# Altium PCB CAN_Test_Runner.PcbDoc (part 1 of 2)
Units mil, origin at the board's own origin, x right, y up, seen from the top; angles counter-clockwise.
Board outline 3937.01 x 2598.43 mil, 4 copper layers (Top Layer, Mid-Layer 1, Mid-Layer 2, Bottom Layer); 131 components, 89 nets, 516 pads, 356 vias.
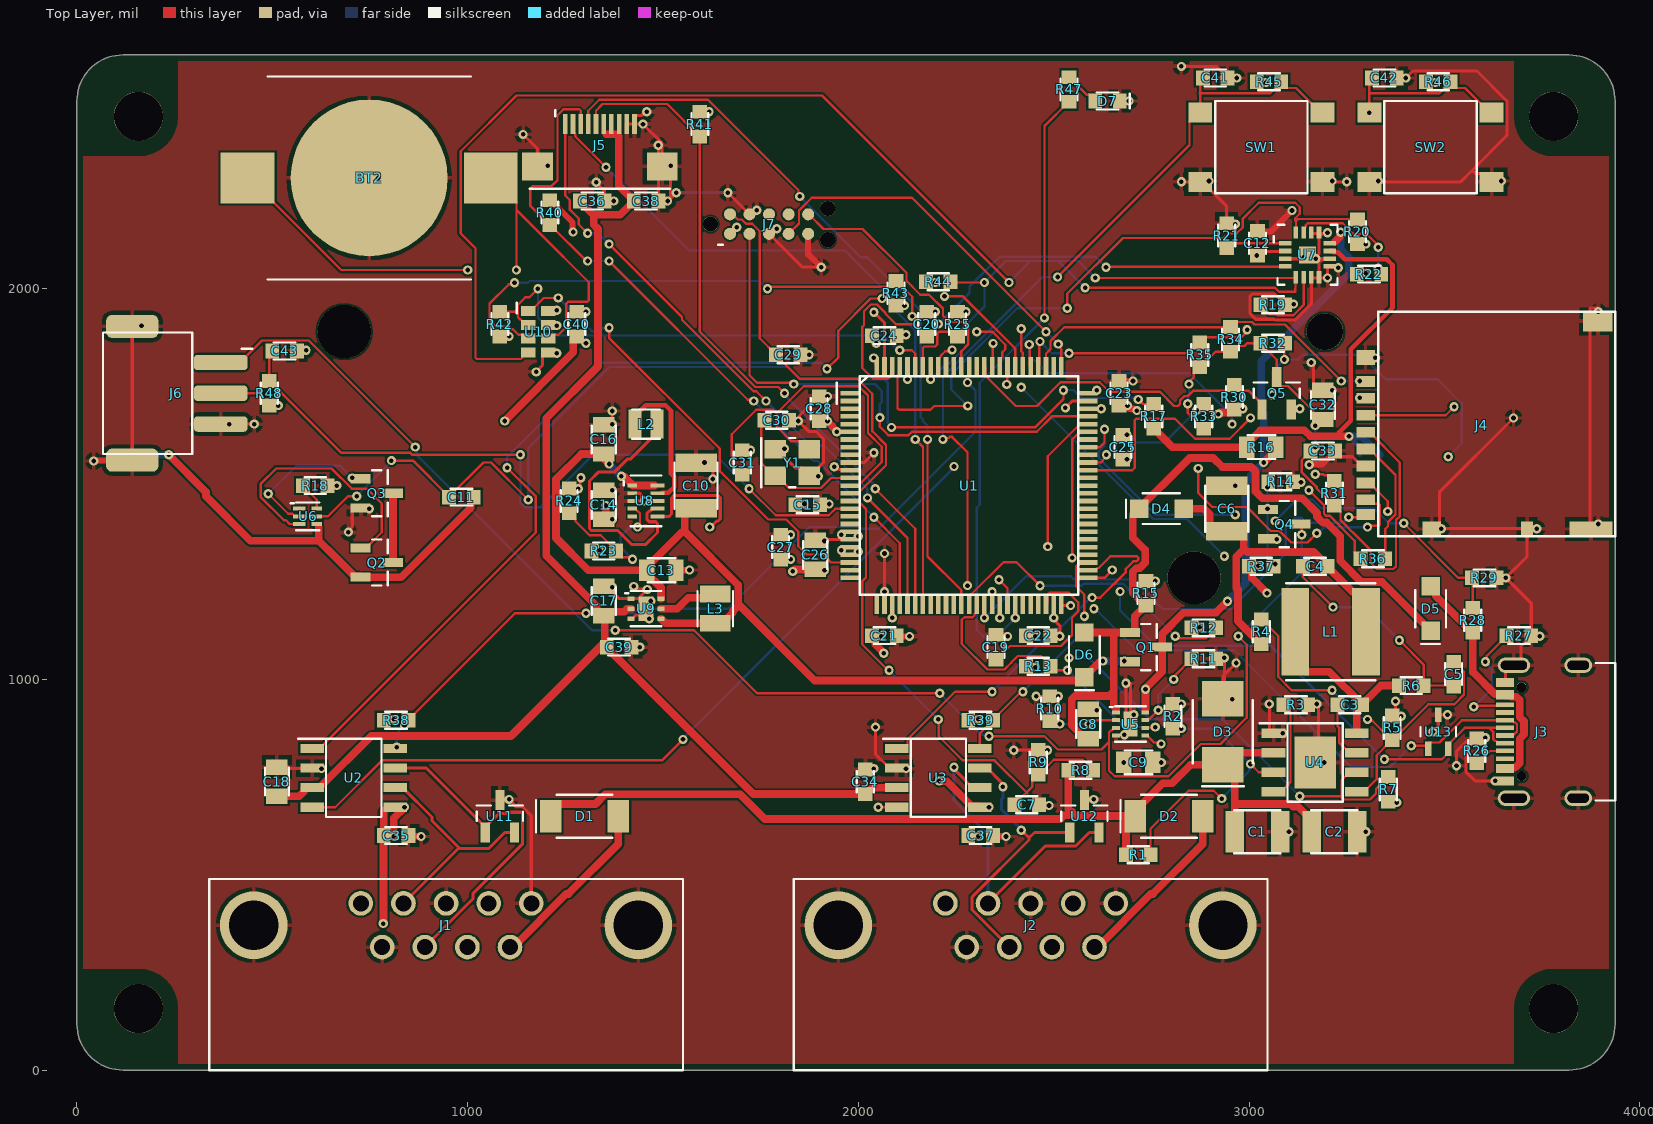
[diagram p0: Top Layer view]
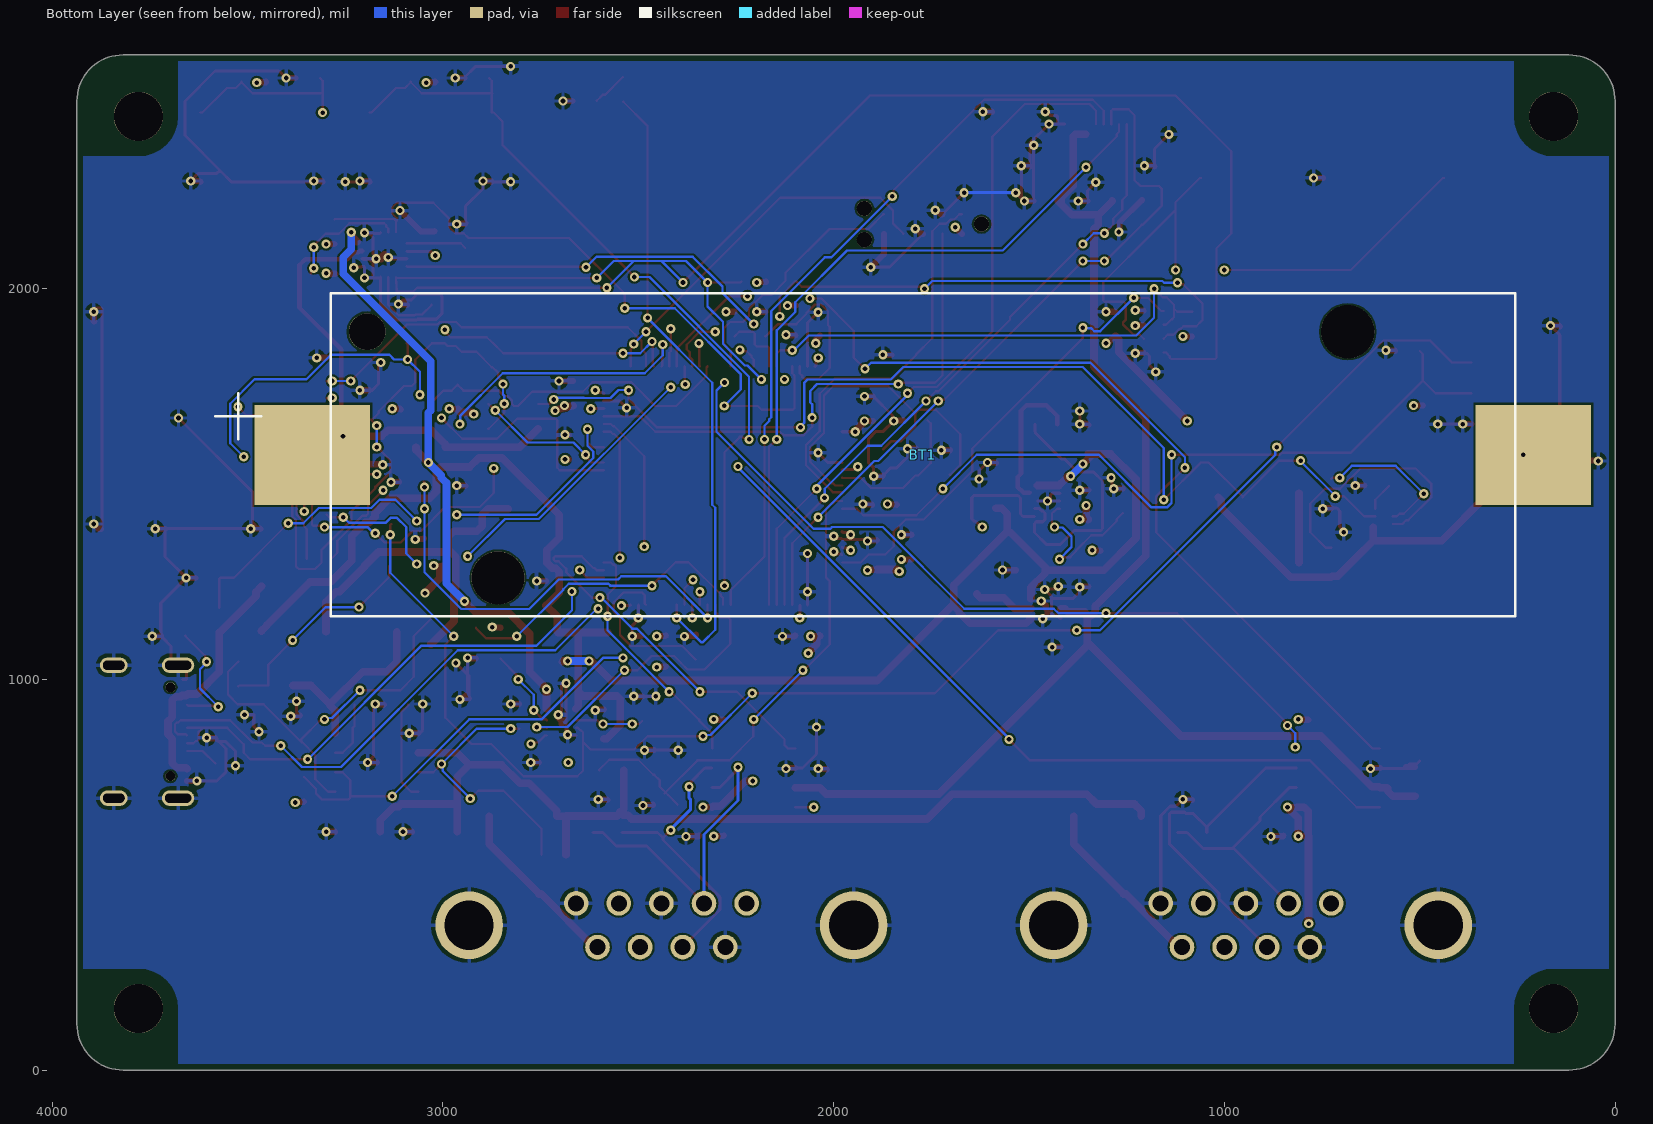
[diagram p1: Bottom Layer view, seen from below]
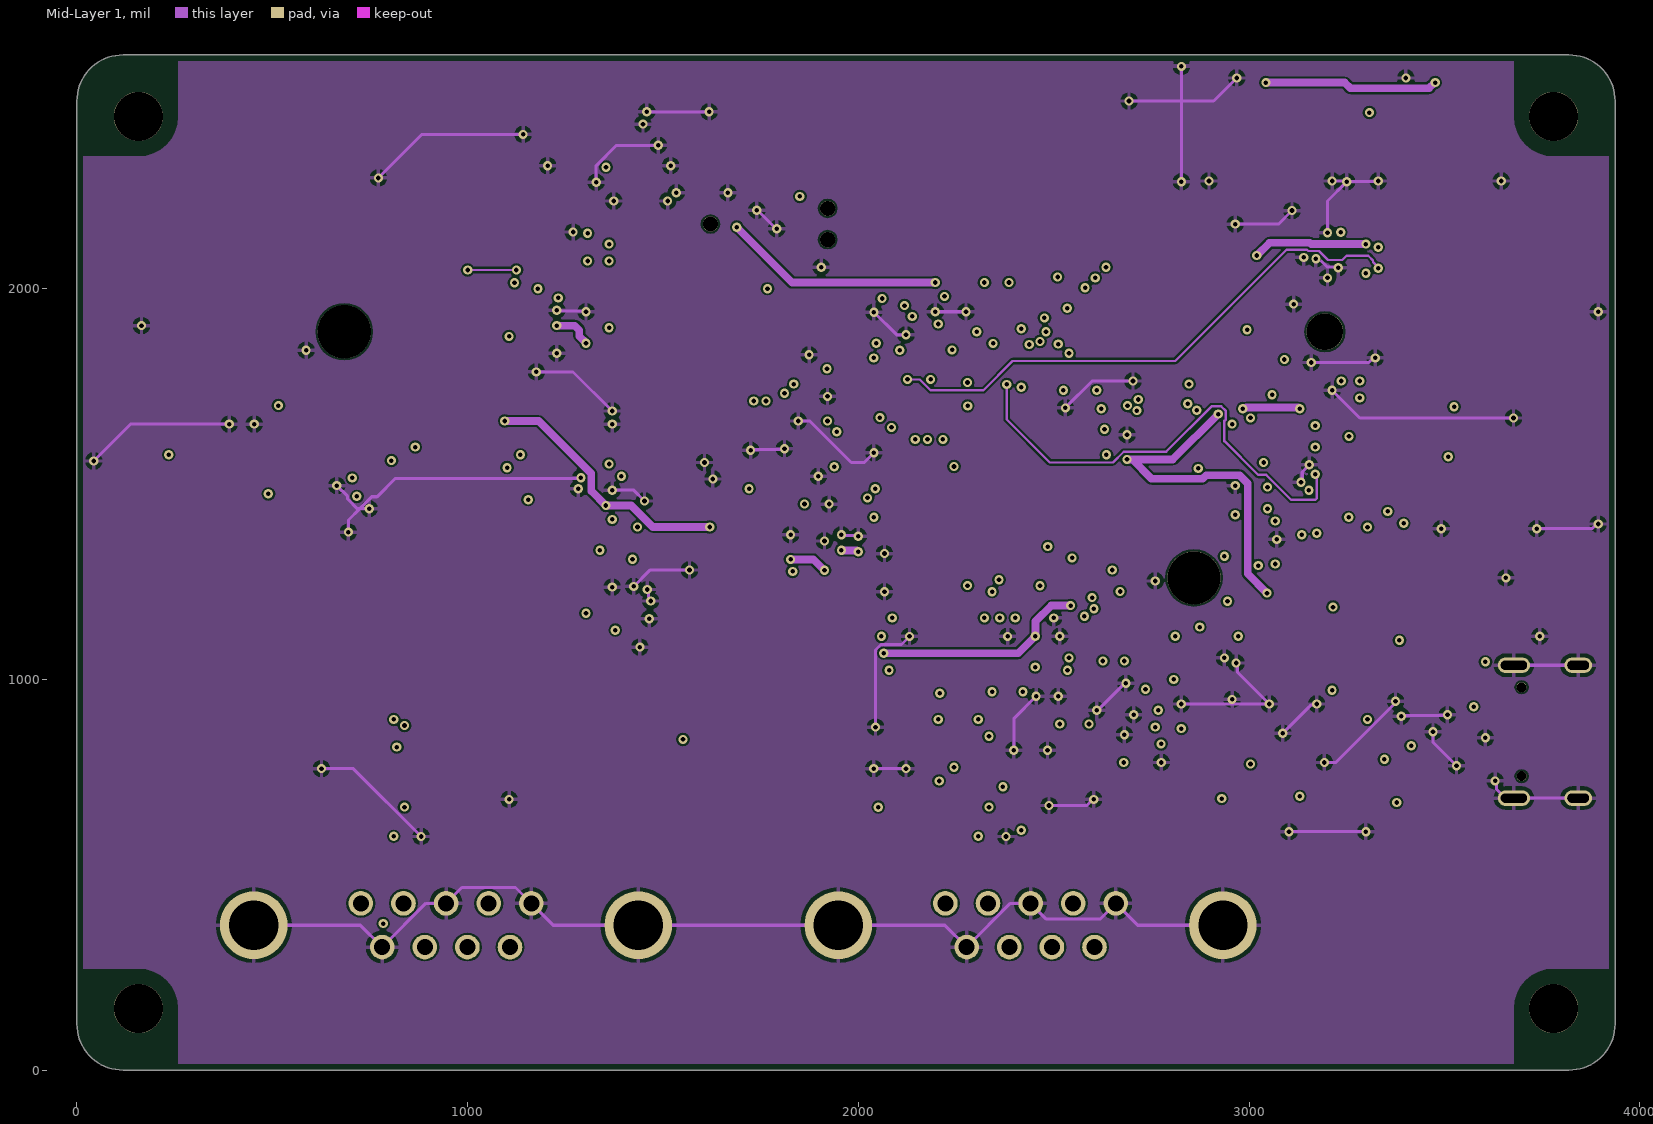
[diagram p2: Mid-Layer 1]
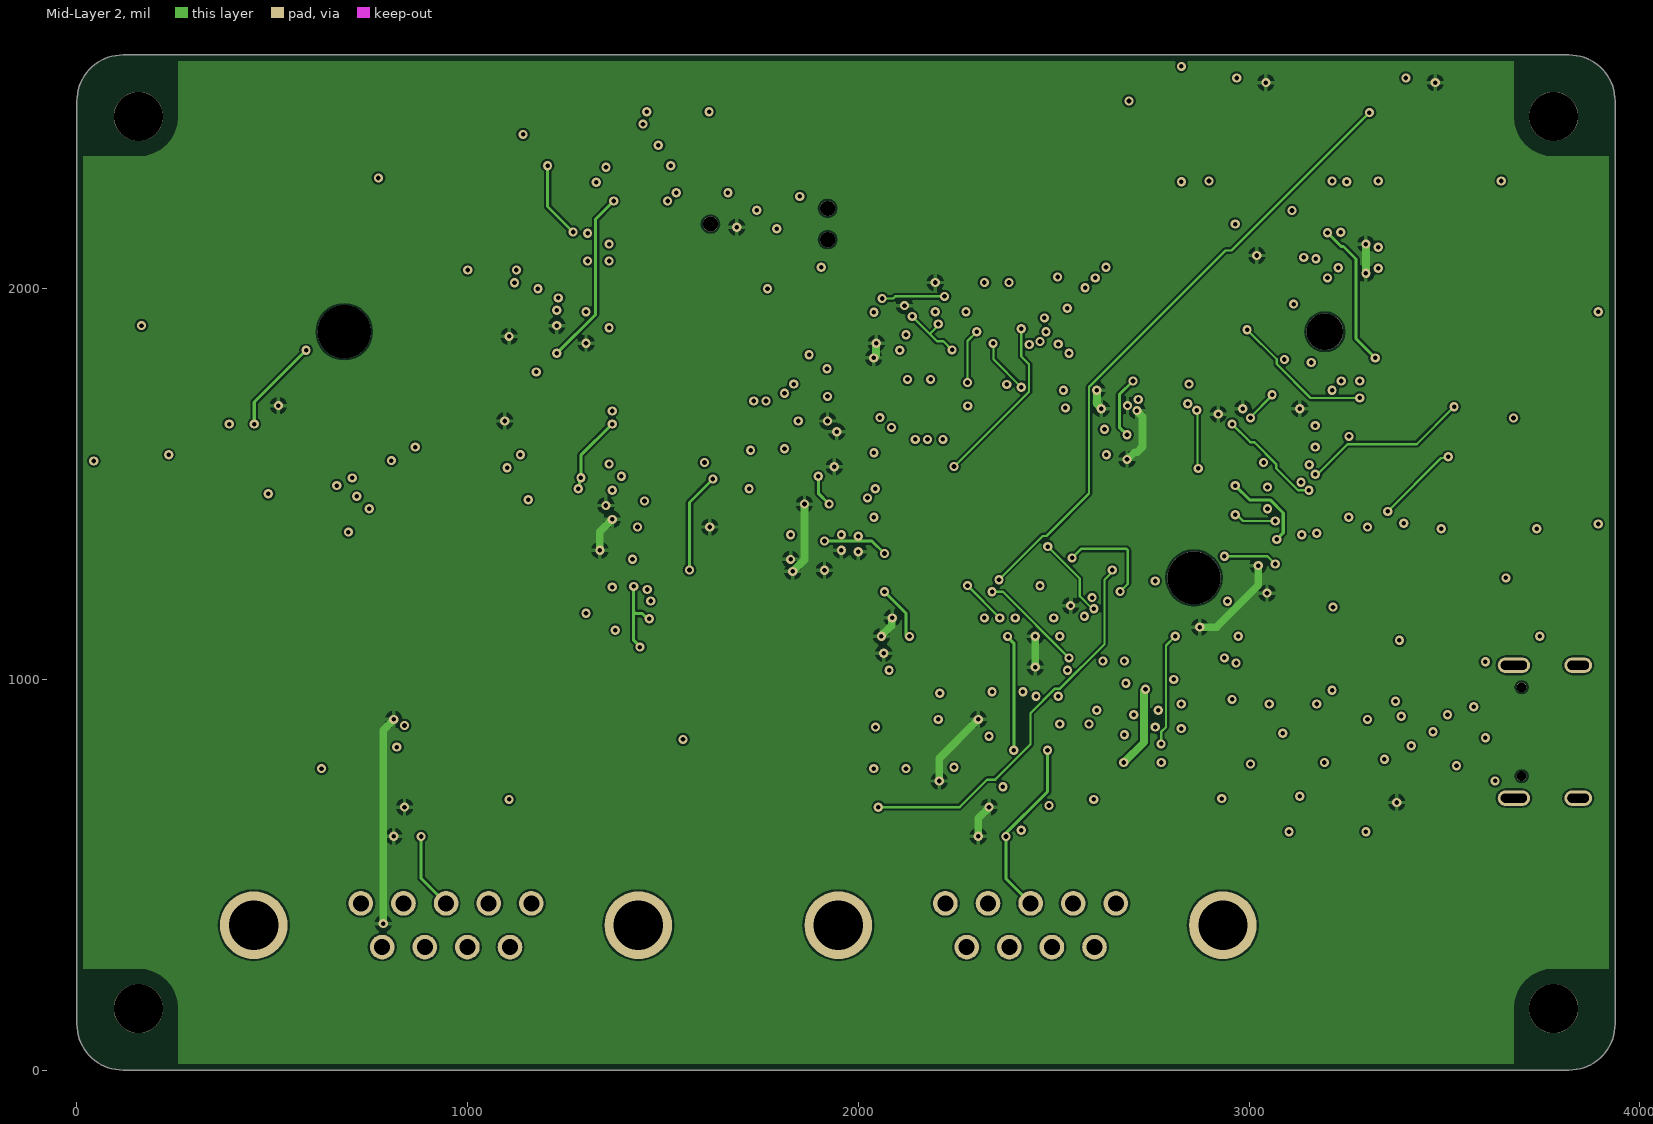
[diagram p3: Mid-Layer 2]
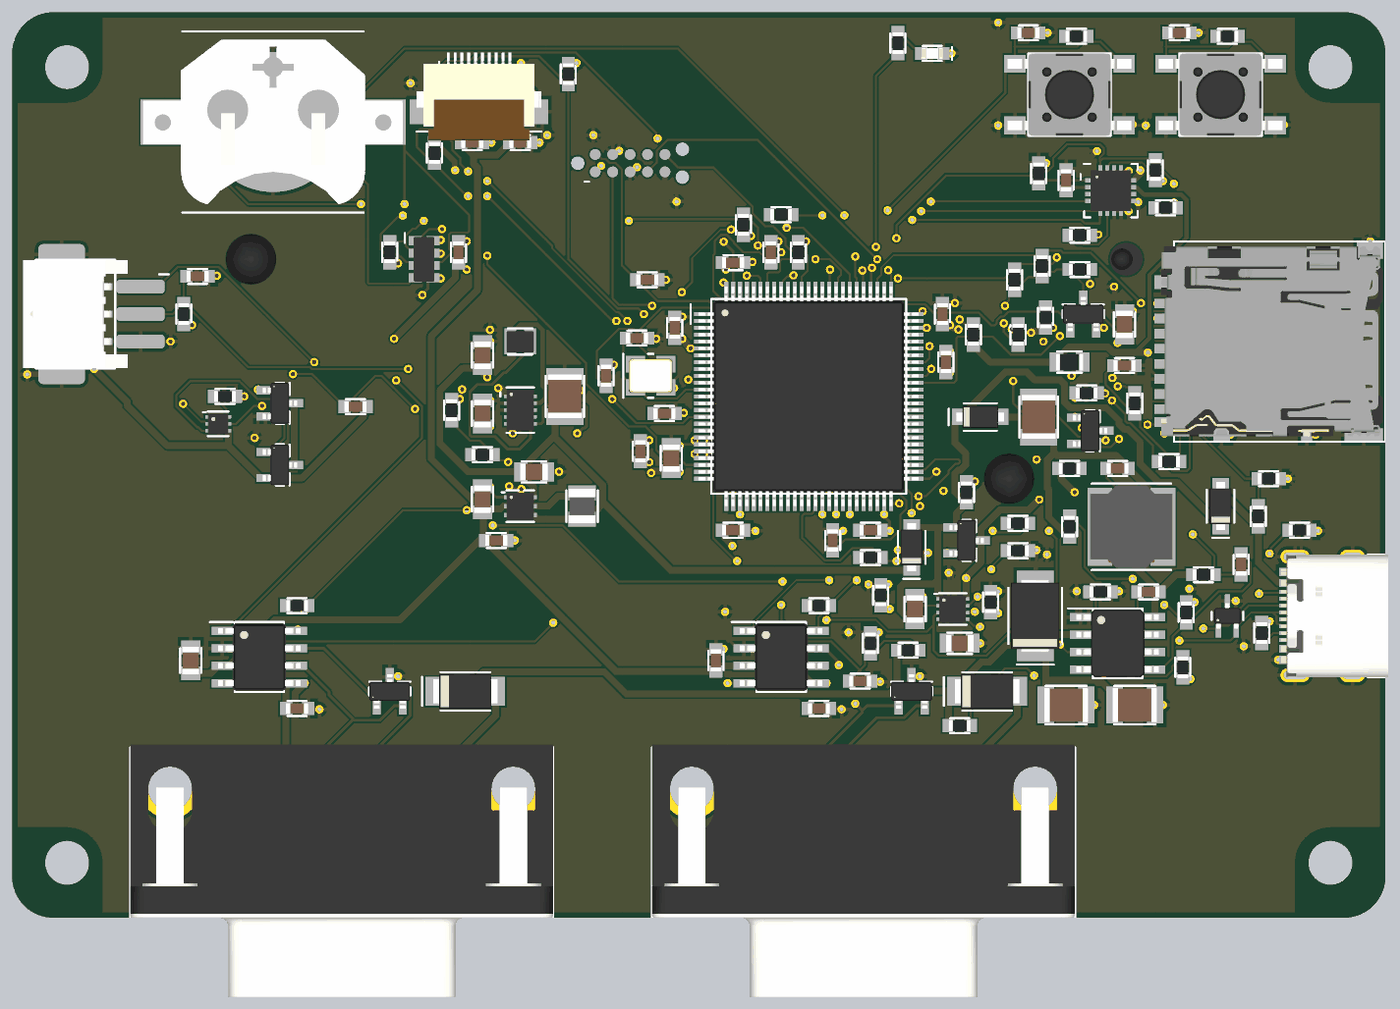
[diagram p5: 3D render of the assembled board from above, using the file's embedded part models]

## Layer stack, top to bottom
Top Solder: solder mask 0.4, Solder Resist, Dk 3.5
Top Layer: signal copper 1.4
Dielectric 1: dielectric 12.6, FR-4, Dk 4.8
Mid-Layer 1: signal copper 1.4
Dielectric2: dielectric 12.6, FR-4, Dk 4.8
Mid-Layer 2: signal copper 1.4
Dielectric3: dielectric 12.6, FR-4, Dk 4.8
Bottom Layer: signal copper 1.4
Bottom Solder: solder mask 0.4, Solder Resist, Dk 3.5

## Board outline
118.11,0 3818.9,0 ccw(c3818.9,118.11) 3937.01,118.11 3937.01,2480.32 ccw(c3818.9,2480.32) 3818.9,2598.43 118.11,2598.43 ccw(c118.11,2480.32) 0,2480.32 0,118.11 ccw(c118.11,118.11)

## Design rules (kind name [scope] priority, off if disabled: settings)
Clearance [All] p1: gap=5 ignorepadtopadclearanceinfootprint=FALSE
FanoutControl Fanout_Default [All] p1: bgadir=Out bgaviamode=Centered fanoutstyle=Auto fanoutdirection=Alternating viagrid=1 // Fanout_Default (Default Rule)
FanoutControl Fanout_Small [(CompPinCount < 5)] p2: bgadir=Out bgaviamode=Centered fanoutstyle=Auto fanoutdirection=OutThenIn viagrid=1 // Fanout_Small (Default Rule)
FanoutControl Fanout_LCC [IsLCC] p4: bgadir=Out bgaviamode=Centered fanoutstyle=Auto fanoutdirection=Alternating viagrid=1 // Fanout_LCC (Default Rule)
FanoutControl Fanout_BGA [IsBGA] p5: bgadir=Out bgaviamode=Centered fanoutstyle=Auto fanoutdirection=Alternating viagrid=1 // Fanout_BGA (Default Rule)
HoleSize [All] p1: absolutevalues=TRUE maxlimit=137.8 minlimit=1 maxpercent=80.000 minpercent=20.000
MinimumSolderMaskSliver [All] p1: minsoldermaskwidth=2.95
PasteMaskExpansion NoPaste_TagConnect [InComponent('J7')] p1: expansion=-15.75
PasteMaskExpansion [All] p2: expansion=0
PolygonConnect [All] p1: connectstyle=Relief reliefconductorwidth=10 reliefentries=4 polygonreliefangle="90 Angle" airgapwidth=10
RoutingVias [All] p1: holewidth=11.81 width=23.62 viastyle="Through Hole" minholewidth=11.81 minwidth=23.62 maxholewidth=15.75 maxwidth=31.5
SilkToSolderMaskClearance [IsPad] p1 off: minsilkscreentomaskgap=10 clearancetoexposedcopper=TRUE
SolderMaskExpansion [All] p1: expansion=0 istentingtop=FALSE
SupplyNets "Schematic Supply Nets" [InNet('5V_AUX')] p1: voltage=0.000
SupplyNets "Schematic Supply Nets_1" [InNet('GND')] p2: voltage=0.000
SupplyNets "Schematic Supply Nets_2" [InNet('3V3')] p3: voltage=0.000
Width Width_Power [InNet('GND') or InNet('3V3') or InNet('5V_AUX') or InNet('VSYS') or InNet('VBAT') or InNet('VCHG') or InNet('5V_BUCK') or InNet('VIN_P') or InNet('V1_IN') or InNet('V2_IN') or InNet('CELL_P') or InNet('CELL_N') or InNet('FET_MID') or InNet('BUCK_SW') or InNet('BB_L1') or InNet('BB_L2') or InNet('BOOST_SW') or InNet('VBUS')] p1: maxlimit=78.74 minlimit=7.87 preferedwidth=19.68 minimp=50.000000 maximp=50.000000 favimp=50.000000
Width Width_CAN [InNet('CAN1_H_C') or InNet('CAN1_L_C') or InNet('CAN2_H_C') or InNet('CAN2_L_C')] p2: maxlimit=19.68 minlimit=5.91 preferedwidth=7.87 minimp=50.000000 maximp=50.000000 favimp=50.000000
Width [not (InNet('GND') or InNet('3V3') or InNet('5V_AUX') or InNet('VSYS') or InNet('VBAT') or InNet('VCHG') or InNet('5V_BUCK') or InNet('VIN_P') or InNet('V1_IN') or InNet('V2_IN') or InNet('CELL_P') or InNet('CELL_N') or InNet('FET_MID') or InNet('BUCK_SW') or InNet('BB_L1') or InNet('BB_L2') or InNet('BOOST_SW') or InNet('VBUS'))] p3: maxlimit=39.37 minlimit=4.02 preferedwidth=5.91 minimp=50.000000 maximp=50.000000 favimp=50.000000
22 further rules are at their usual default settings.

## Components (designator, comment, footprint, x,y, rotation, side; value= is the part's Value field where it differs from the comment)
BT1 "LiFePO4 18650" BATT_KEYSTONE_1042_18650 1771.65,1574.8 r180 bottom locked
BT2 "CR1220" BATT_KEYSTONE_3000_12MM 748.03,2283.46 r0 top
C1 "2.2uF 100V" C1210 3021.65,610.24 r0 top
C2 "2.2uF 100V" C1210 3218.5,610.24 r0 top
C3 "2.2nF 50V" C0603 3257.87,935.04 r0 top
C4 "3.3nF" C0603 3169.29,1289.37 r0 top
C5 "180pF C0G" C0603 3523.62,1013.78 r90 top
C6 "22uF 25V" C1210 2942.91,1437.01 r90 top
C7 "100nF" C0603 2431.1,679.13 r0 top
C8 "10uF" C0805 2588.58,885.83 r90 top
C9 "4.7uF" C0805 2716.54,787.4 r0 top
C10 "22uF" C1210 1584.65,1496.06 r90 top
C11 "100nF" C0603 984.25,1466.54 r0 top
C12 "100nF" C0603 3021.65,2116.14 r90 top
C13 "10uF" C0805 1496.06,1279.53 r0 top
C14 "22uF" C0805 1348.43,1446.85 r90 top
C15 "100nF" C0603 1870.08,1446.85 r0 top
C16 "10uF" C0805 1348.43,1614.17 r90 top
C17 "10uF" C0805 1348.43,1200.79 r90 top
C18 "10uF" C0805 511.81,738.19 r90 top
C19 "2.2uF" C0603 2352.36,1082.68 r90 top
C20 "2.2uF" C0603 2175.2,1909.45 r90 top
C21 "100nF" C0603 2066.93,1112.2 r0 top
C22 "100nF" C0603 2460.63,1112.2 r0 top
C23 "100nF" C0603 2667.32,1732.28 r90 top
C24 "100nF" C0603 2066.93,1879.92 r0 top
C25 "100nF" C0603 2677.17,1594.49 r90 top
C26 "4.7uF" C0805 1889.76,1318.9 r90 top
C27 "100nF" C0603 1801.18,1338.58 r90 top
C28 "1uF" C0603 1899.61,1692.91 r90 top
C29 "100nF" C0603 1820.87,1830.71 r0 top
C30 "27pF C0G" C0603 1791.34,1663.39 r0 top
C31 "27pF C0G" C0603 1702.76,1555.12 r90 top
C32 "10uF" C0805 3188.98,1702.76 r90 top
C33 "100nF" C0603 3188.98,1584.65 r0 top
C34 "100nF" C0603 2017.72,738.19 r90 top
C35 "100nF" C0603 816.93,600.39 r0 top
C36 "100nF" C0603 1318.9,2224.41 r0 top
C37 "100nF" C0603 2312.99,600.39 r0 top
C38 "1uF" C0603 1456.69,2224.41 r0 top
C39 "100nF" C0603 1387.8,1082.68 r0 top
C40 "100nF" C0603 1279.53,1909.45 r90 top
C41 "100nF" C0603 2913.39,2539.37 r0 top
C42 "100nF" C0603 3346.46,2539.37 r0 top
C43 "100nF" C0603 531.5,1840.55 r0 top
D1 "PMEG10030ELP" SOD128 1299.21,649.61 r0 top
D2 "PMEG10030ELP" SOD128 2795.28,649.61 r0 top
D3 "SMBJ36A" SMB 2933.07,866.14 r90 top
D4 "PMEG4030ER" SOD123W 2775.59,1437.01 r0 top
D5 "PMEG4030ER" SOD123W 3464.57,1181.1 r90 top
D6 "PMEG4030ER" SOD123W 2578.74,1062.99 r90 top
D7 "Green" LED0603 2637.8,2480.32 r0 top
J1 "CH1 DB9" DSUB-9_M_WR-DSUB_618009231221 944.88,370.87 r0 top
J2 "CH2 DB9" DSUB-9_M_WR-DSUB_618009231221 2440.94,370.87 r0 top
J3 "USB-C" USB-C_GCT_USB4105 3800.2,866.14 r90 top
J4 "microSD" MICROSD_HIROSE_DM3AT 3602.36,1653.54 r90 top
J5 "LS027B7DH01A" FPC_10P_0.5_WR-FPC_687110149022 1338.58,2421.26 r0 top
J6 "Cell NTC x2" JST_PH_S3B-PH-SM4-TB 255.91,1732.28 r270 top
J7 "SWD" TAG-CONNECT_TC2050-IDC-NL 1771.65,2165.35 r0 top
L1 "33uH" L_WE-LQS-6045 3208.66,1122.05 r0 top
L2 "0.47uH" L_WE-MAPI-2016 1456.69,1653.54 r0 top
L3 "2.2uH" L_WE-LQS-2520 1633.86,1181.1 r90 top
Q1 "PMV48XP" SOT-23-3 2736.22,1082.68 r0 top
Q2 "PMV16XN" SOT-23-3 767.72,1299.21 r0 top
Q3 "PMV16XN" SOT-23-3 767.72,1476.38 r0 top
Q4 "PMV16XN" SOT-23-3 3090.55,1397.64 r0 top
Q5 "PMV48XP" SOT-23-3 3070.87,1732.28 r90 top
R1 "232k" R0603 2716.54,551.18 r0 top
R2 "100k" R0603 2805.12,905.51 r90 top
R3 "31.6k" R0603 3120.08,935.04 r0 top
R4 "158k" R0603 3031.5,1122.05 r90 top
R5 "49.9k" R0603 3366.14,875.98 r90 top
R6 "75k" R0603 3415.35,984.25 r0 top
R7 "100k" R0603 3356.3,718.5 r90 top
R8 "200k" R0603 2568.9,767.72 r0 top
R9 "20k" R0603 2460.63,787.4 r90 top
R10 "1k" R0603 2490.16,925.2 r90 top
R11 "82k" R0603 2883.86,1053.15 r0 top
R12 "10k" R0603 2883.86,1131.89 r0 top
R13 "10k" R0603 2460.63,1033.46 r0 top
R14 "100k" R0603 3080.71,1505.91 r0 top
R15 "47k" R0603 2736.22,1220.47 r90 top
R16 "0.1R" R0805 3031.5,1594.49 r0 top
R17 "330" R0603 2755.91,1673.23 r90 top
R18 "2.2k" R0603 610.24,1496.06 r0 top
R19 "0" R0603 3061.02,1958.66 r0 top
R20 "10k" R0603 3277.56,2145.67 r90 top
R21 "10k" R0603 2942.91,2135.83 r90 top
R22 "10k" R0603 3307.09,2037.4 r0 top
R23 "383k" R0603 1348.43,1328.74 r0 top
R24 "68.1k" R0603 1259.84,1456.69 r90 top
R25 "10k" R0603 2253.94,1909.45 r90 top
R26 "5.1k" R0603 3582.68,816.93 r90 top
R27 "5.1k" R0603 3690.94,1112.2 r0 top
R28 "22k" R0603 3572.83,1151.57 r90 top
R29 "33k" R0603 3602.36,1259.84 r0 top
R30 "100k" R0603 2962.6,1722.44 r90 top
R31 "47k" R0603 3218.5,1476.38 r90 top
R32 "47k" R0603 3061.02,1860.24 r0 top
R33 "47k" R0603 2883.86,1673.23 r90 top
R34 "47k" R0603 2952.76,1870.08 r90 top
R35 "47k" R0603 2874.02,1830.71 r90 top
R36 "22" R0603 3316.93,1309.06 r0 top
R37 "100k" R0603 3031.5,1289.37 r0 top
R38 "10k" R0603 816.93,895.67 r0 top
R39 "10k" R0603 2312.99,895.67 r0 top
R40 "100k" R0603 1210.63,2194.88 r90 top
R41 "100k" R0603 1594.49,2421.26 r90 top
R42 "10k" R0603 1082.68,1909.45 r90 top
R43 "4.7k" R0603 2096.46,1988.19 r90 top
R44 "4.7k" R0603 2204.72,2017.72 r0 top
R45 "10k" R0603 3051.18,2529.53 r0 top
R46 "10k" R0603 3484.25,2529.53 r0 top
R47 "1k" R0603 2539.37,2509.84 r90 top
R48 "10k" R0603 492.13,1732.28 r90 top
SW1 "START/STOP" SW_WS-TASV_6x6 3031.5,2362.2 r0 top
SW2 "MODE" SW_WS-TASV_6x6 3464.57,2362.2 r0 top
U1 "STM32H563VIT6" LQFP-100_14x14 2283.46,1496.06 r0 top
U2 "MCP2562FD CH1" SOIC-8_150MIL 708.66,748.03 r0 top
U3 "MCP2562FD CH2" SOIC-8_150MIL 2204.72,748.03 r0 top
U4 "LM5164-Q1" SOIC-8_DDA_PowerPAD 3169.29,787.4 r0 top
U5 "BQ25170" WSON-8_DSG 2696.85,885.83 r0 top
U6 "BQ29706" WSON-6_DSE 590.55,1417.32 r0 top
U7 "PAC1941-1" VQFN-16_3x3_4MX 3149.61,2086.61 r0 top
U8 "TPS63802" VSON-10_DLA 1456.69,1456.69 r0 top
U9 "TPS610997" WSON-6_DRV 1456.69,1181.1 r0 top
U10 "RV-3028-C7" RV-3028-C7 1181.1,1889.76 r0 top
U11 "ESD2CANFD24" SOT-23-3 1082.68,649.61 r90 top
U12 "ESD2CANFD24" SOT-23-3 2578.74,649.61 r90 top
U13 "TPD2E2U06" SC-70-3 3484.25,866.14 r90 top
Y1 "24 MHz" XTAL_3225_4P 1830.71,1555.12 r0 top

## Footprints (in the part's own frame and the unit in brackets; to place one, negate y for a bottom-side part, rotate by r counter-clockwise, add the part's x,y. Pads: shape width x height; smd on the part's side, far side on the other; paste and mask are expansions set on the pad)
BATT_KEYSTONE_1042_18650 [mm] "Keystone 1042 SMT 18650 holder"
  rect 7.5x6.5 smd: 1(-39.69,0) 2(39.69,0)
  round 2.39 hole 2.39 unplated: ""(-36.13,8)
  round 3.45 hole 3.45 unplated: ""(-27.62,-8) ""(27.62,8)
  silkscreen extent -46,-10.5 38.5,10.5, body extent -43.21,-10.33 43.21,10.33, height 16.3
BATT_KEYSTONE_3000_12MM [mm] "Keystone 3000 SMT CR1220 retainer"
  rect 3.5x3.3 smd: 1(-7.9,0) 1(7.9,0)
  round 10.2 smd: 2(0,0)
  silkscreen extent -6.6,-6.6 6.6,6.6, body extent -9.46,-6 9.46,6, height 3.38
C0603 [mm] "0603 capacitor, IPC-7351 nominal"
  rect 0.9x0.95 smd: 1(-0.8,0) 2(0.8,0)
  silkscreen extent -0.7,-0.55 0.7,0.55, body extent -0.8,-0.4 0.8,0.4, height 0.8
C0805 [mm] "0805 capacitor, IPC-7351 nominal"
  rect 1x1.4 smd: 1(-0.95,0) 2(0.95,0)
  silkscreen extent -0.9,-0.77 0.9,0.78, body extent -1,-0.63 1,0.63, height 1.25
C1210 [mm] "1210 capacitor, IPC-7351 nominal"
  rect 1.2x2.7 smd: 1(-1.475,0) 2(1.475,0)
  silkscreen extent -1.5,-1.4 1.5,1.4, body extent -1.6,-1.25 1.6,1.25, height 2.5
DSUB-9_M_WR-DSUB_618009231221 [mm] "Wurth WR-DSUB male angled 9 pin; board edge 8.0 mm below pin row 6-9"
  round 1.6 hole 1.04: 1(-5.54,1.42) 2(-2.77,1.42) 3(0,1.42) 4(2.77,1.42) 5(5.54,1.42) 6(-4.155,-1.42) 7(-1.385,-1.42) 8(1.385,-1.42) 9(4.155,-1.42)
  round 4.4 hole 3.2: MH(-12.5,0) MH(12.5,0)
  silkscreen extent -15.4,-9.42 15.4,3, body extent -15.4,-15.22 15.4,3.22, height 12.5
FPC_10P_0.5_WR-FPC_687110149022 [mm] "Wurth WR-FPC 0.5 mm, 10 pins, horizontal"
  rect 0.3x1.3 smd: 1(-2.25,0) 2(-1.75,0) 3(-1.25,0) 4(-0.75,0) 5(-0.25,0) 6(0.25,0) 7(0.75,0) 8(1.25,0) 9(1.75,0) 10(2.25,0)
  rect 2x1.8 smd: MP(-4.05,-2.75) MP(4.05,-2.75)
  silkscreen extent -4.55,-4.2 4.55,0.9, body extent -4.55,-4.85 4.55,1.55, height 2
JST_PH_S3B-PH-SM4-TB [mm] "JST PH 2.0 mm, 3 pin, SMD side entry"
  rrect50% 1x3.5 smd: 1(-2,2.85) 2(0,2.85) 3(2,2.85)
  rrect50% 1.5x3.4 smd: MP(-4.35,-2.9) MP(4.35,-2.9)
  silkscreen extent -3.95,-4.8 3.95,4.9, body extent -3.95,-5.7 3.95,1.9, height 4.85
L_WE-LQS-2520 [mm] "Wurth WE-LQS 2520, 74404024022 land pattern"
  rect 1.1x2 smd: 1(-0.95,0) 2(0.95,0)
  silkscreen extent -1.15,-1.15 1.15,1.15, body extent -1.25,-1 1.25,1, height 1.2
L_WE-LQS-6045 [mm] "Wurth WE-LQS 6045, 74404064330 land pattern"
  rect 1.8x5.7 smd: 1(-2.3,0) 2(2.3,0)
  silkscreen extent -2.9,-3.15 2.9,3.15, body extent -3,-3 3,3, height 4.2
L_WE-MAPI-2016 [mm] "Wurth WE-MAPI 2016, 744383430047 land pattern"
  rect 0.85x1.9 smd: 1(-0.725,0) 2(0.725,0)
  silkscreen extent -0.9,-0.95 0.9,0.95, body extent -1.01,-0.8 1.01,0.8, height 1
LED0603 [mm] "0603 LED, pad 2 = cathode"
  rect 0.9x0.95 smd: 1(-0.8,0) 2(0.8,0)
  silkscreen extent -0.7,-0.55 1.45,0.55, body extent -0.8,-0.4 0.8,0.4, height 1.1
LQFP-100_14x14 [mm] "LQFP-100 14 x 14 mm, 0.5 mm pitch, ST DS14258 footprint example"
  rect 1.2x0.3 smd: 1(-7.75,6) 2(-7.75,5.5) 3(-7.75,5) 4(-7.75,4.5) 5(-7.75,4) 6(-7.75,3.5) 7(-7.75,3) 8(-7.75,2.5) 9(-7.75,2) 10(-7.75,1.5) 11(-7.75,1) 12(-7.75,0.5) 13(-7.75,0) 14(-7.75,-0.5) 15(-7.75,-1) 16(-7.75,-1.5) 17(-7.75,-2) 18(-7.75,-2.5) 19(-7.75,-3) 20(-7.75,-3.5) 21(-7.75,-4) 22(-7.75,-4.5) 23(-7.75,-5) 24(-7.75,-5.5) 25(-7.75,-6) 51(7.75,-6) 52(7.75,-5.5) 53(7.75,-5) 54(7.75,-4.5) 55(7.75,-4) 56(7.75,-3.5) 57(7.75,-3) 58(7.75,-2.5) 59(7.75,-2) 60(7.75,-1.5) 61(7.75,-1) 62(7.75,-0.5) 63(7.75,0) 64(7.75,0.5) 65(7.75,1) 66(7.75,1.5) 67(7.75,2) 68(7.75,2.5) 69(7.75,3) 70(7.75,3.5) 71(7.75,4) 72(7.75,4.5) 73(7.75,5) 74(7.75,5.5) 75(7.75,6)
  rect 0.3x1.2 smd: 26(-6,-7.75) 27(-5.5,-7.75) 28(-5,-7.75) 29(-4.5,-7.75) 30(-4,-7.75) 31(-3.5,-7.75) 32(-3,-7.75) 33(-2.5,-7.75) 34(-2,-7.75) 35(-1.5,-7.75) 36(-1,-7.75) 37(-0.5,-7.75) 38(0,-7.75) 39(0.5,-7.75) 40(1,-7.75) 41(1.5,-7.75) 42(2,-7.75) 43(2.5,-7.75) 44(3,-7.75) 45(3.5,-7.75) 46(4,-7.75) 47(4.5,-7.75) 48(5,-7.75) 49(5.5,-7.75) 50(6,-7.75) 76(6,7.75) 77(5.5,7.75) 78(5,7.75) 79(4.5,7.75) 80(4,7.75) 81(3.5,7.75) 82(3,7.75) 83(2.5,7.75) 84(2,7.75) 85(1.5,7.75) 86(1,7.75) 87(0.5,7.75) 88(0,7.75) 89(-0.5,7.75) 90(-1,7.75) 91(-1.5,7.75) 92(-2,7.75) 93(-2.5,7.75) 94(-3,7.75) 95(-3.5,7.75) 96(-4,7.75) 97(-4.5,7.75) 98(-5,7.75) 99(-5.5,7.75) 100(-6,7.75)
  silkscreen extent -8.6,-7.1 7.1,7.1, body extent -8,-8 8,8, height 1.5
MICROSD_HIROSE_DM3AT [mm] "Hirose DM3AT-SF-PEJM5 microSD push-push with card detect"
  rect 0.7x1.2 smd: 1(2.775,7.725) 2(1.675,7.725) 3(0.575,7.725) 4(-0.525,7.725) 5(-1.625,7.725) 6(-2.725,7.725) 7(-3.825,7.725) 8(-4.925,7.725) 9(-5.875,7.725)
  rect 1x0.8 smd: 10(-6.825,-2.775)
  rect 1x2.8 smd: SH(-6.825,-6.925)
  rect 1x1.2 smd: SH(-6.825,3.425) SH(4.325,7.725)
  rect 1.3x1.9 smd: SH(6.675,-7.375)
  silkscreen extent -7.3,-8.5 7.3,6.9, body extent -6.93,-8.32 6.93,7.83, height 1.68
R0603 [mm] "0603 resistor, IPC-7351 nominal"
  rect 0.9x0.95 smd: 1(-0.8,0) 2(0.8,0)
  silkscreen extent -0.7,-0.55 0.7,0.55, body extent -0.8,-0.4 0.8,0.4, height 0.45
R0805 [mm] "0805 resistor, IPC-7351 nominal"
  rect 1x1.4 smd: 1(-0.95,0) 2(0.95,0)
  silkscreen extent -0.9,-0.78 0.9,0.77, body extent -1,-0.6 1,0.6, height 0.45
RV-3028-C7 [mm] "Micro Crystal C7 package 3.2 x 1.5, datasheet recommended pad, x-check KiCad"
  rect 0.95x0.65 smd: 1(-0.65,1.35) 2(-0.65,0.45) 3(-0.65,-0.45) 4(-0.65,-1.35) 5(0.65,-1.35) 6(0.65,-0.45) 7(0.65,0.45) 8(0.65,1.35)
  silkscreen extent -1.4,1.2 -1.4,1.9, body extent -0.75,-1.65 0.75,1.65, height 0.89
SC-70-3 [mm] "SC-70-3, TI DCK0003A land pattern"
  rect 0.95x0.4 smd: 1(-1.1,0.65) 2(-1.1,-0.65) 3(1.1,0)
  silkscreen extent -0.3,-1.15 0.3,1.15, body extent -1.05,-1 1.05,1, height 1.1
SMB [mm] "DO-214AA (SMB), Bourns recommended footprint, pad 1 = cathode"
  rect 2.3x2.7 smd: 1(-2.15,0) 2(2.15,0)
  silkscreen extent -3.55,-1.95 2.05,1.95, body extent -2.65,-1.78 2.65,1.78, height 2.15
SOD123W [mm] "Nexperia CFP3/SOD123W reflow footprint, pad 1 = cathode"
  rect 1.2x1.2 smd: 1(-1.45,0) 2(1.45,0)
  silkscreen extent -2.3,-1 1.2,1, body extent -1.75,-0.8 1.75,0.8, height 1.1
SOD128 [mm] "Nexperia CFP5/SOD128 reflow footprint, pad 1 = cathode"
  rect 1.4x2.1 smd: 1(-2.2,0) 2(2.2,0)
  silkscreen extent -3.15,-1.4 1.8,1.4, body extent -2.35,-1.25 2.35,1.25, height 1.01
SOIC-8_150MIL [mm] "8-lead SOIC 150 mil, Microchip C04-2065 land pattern"
  rect 1.55x0.6 smd: 1(-2.7,1.905) 2(-2.7,0.635) 3(-2.7,-0.635) 4(-2.7,-1.905) 5(2.7,-1.905) 6(2.7,-0.635) 7(2.7,0.635) 8(2.7,1.905)
  silkscreen extent -3.6,-2.55 1.8,2.55, body extent -3,-2.45 3,2.45, height 1.75
SOIC-8_DDA_PowerPAD [mm] "TI DDA0008B PowerPAD SOIC-8, TI example board layout"
  rect 1.55x0.6 smd: 1(-2.7,1.905) 2(-2.7,0.635) 3(-2.7,-0.635) 4(-2.7,-1.905) 5(2.7,-1.905) 6(2.7,-0.635) 7(2.7,0.635) 8(2.7,1.905)
  rect 2.71x3.4 smd: 9(0,0)
  silkscreen extent -3.6,-2.55 1.8,2.55, body extent -3,-2.45 3,2.45, height 1.55
SOT-23-3 [mm] "SOT-23-3, TI DBZ0003A land pattern (also Nexperia TO-236AB parts)"
  rect 1.3x0.6 smd: 1(-1.05,0.95) 2(-1.05,-0.95) 3(1.05,0)
  silkscreen extent -0.3,-1.5 0.7,1.5, body extent -1.25,-1.5 1.25,1.5, height 1.2
SW_WS-TASV_6x6 [mm] "Wurth WS-TASV 6 x 6 mm tact switch, SMD"
  rect 1.55x1.3 smd: 1(-3.975,2.25) 2(-3.975,-2.25) 3(3.975,2.25) 4(3.975,-2.25)
  silkscreen extent -3,-3 3,3, body extent -4.5,-3 4.5,3, height 4.3
TAG-CONNECT_TC2050-IDC-NL [mm] "Tag-Connect TC2050-IDC-NL, Cortex 10-pin SWD, no legs"
  round 0.787 smd: 1(-2.54,-0.635) 2(-1.27,-0.635) 3(0,-0.635) 4(1.27,-0.635) 5(2.54,-0.635) 6(2.54,0.635) 7(1.27,0.635) 8(0,0.635) 9(-1.27,0.635) 10(-2.54,0.635)
  round 0.99 hole 0.99 unplated: ""(-3.81,0) ""(3.81,-1.016) ""(3.81,1.016)
  silkscreen extent -3.3,-1.35 -3,-1.35
USB-C_GCT_USB4105 [mm] "GCT USB4105 USB-C 2.0 receptacle, top mount; board edge at y = -3.475"
  rect 0.6x1.15 smd: A1(-3.2,3.68) A4(-2.4,3.68) A9(2.4,3.68) A12(3.2,3.68)
  rect 0.3x1.15 smd: A5(-1.25,3.68) A6(-0.25,3.68) A7(0.25,3.68) A8(1.25,3.68) B5(1.75,3.68) B6(0.75,3.68) B7(-0.75,3.68) B8(-1.75,3.68)
  oval 1x1.8 hole 0.6 slot 1.4 at 90 deg: SH(-4.32,-1.075) SH(4.32,-1.075)
  oval 1x2.1 hole 0.6 slot 1.7 at 90 deg: SH(-4.32,3.105) SH(4.32,3.105)
  round 0.65 hole 0.65 unplated: ""(-2.89,2.605) ""(2.89,2.605)
  silkscreen extent -4.47,-3.48 4.47,-2.2, body extent -4.47,-3.67 4.47,4.11, height 3.31
VQFN-16_3x3_4MX [mm] "Microchip VQFN-16 3x3 (4MX), drawing C04-2508"
  rect 0.8x0.3 smd: 1(-1.45,0.75) 2(-1.45,0.25) 3(-1.45,-0.25) 4(-1.45,-0.75) 9(1.45,-0.75) 10(1.45,-0.25) 11(1.45,0.25) 12(1.45,0.75)
  rect 0.3x0.8 smd: 5(-0.75,-1.45) 6(-0.25,-1.45) 7(0.25,-1.45) 8(0.75,-1.45) 13(0.75,1.45) 14(0.25,1.45) 15(-0.25,1.45) 16(-0.75,1.45)
  rect 1.1x1.1 smd: 17(0,0)
  silkscreen extent -2.2,-1.95 1.95,1.95, body extent -1.5,-1.5 1.5,1.5, height 0.78
VSON-10_DLA [mm] "TI DLA0010A VSON-HR 2x3, TI example board layout"
  rect 0.6x0.25 smd: 1(-0.9,1) 2(-0.9,0.5) 3(-0.9,0) 4(-0.9,-0.5) 5(-0.9,-1)
  rect 0.9x0.25 smd: 6(0.75,-1) 7(0.75,-0.5) 9(0.75,0.5) 10(0.75,1)
  rect 1.3x0.25 smd: 8(0.55,0)
  silkscreen extent -1.45,-1.65 1,1.65, body extent -1,-1.49 1,1.49, height 0.75
WSON-6_DRV [mm] "TI DRV0006A WSON-6 2x2, TI example board layout"
  rect 0.45x0.3 smd: 1(-0.975,0.65) 2(-0.975,0) 3(-0.975,-0.65) 4(0.975,-0.65) 5(0.975,0) 6(0.975,0.65)
  rect 1x1.6 smd: 7(0,0)
  silkscreen extent -1.35,-1.15 1,1.15, body extent -1,-0.99 1,0.99, height 0.82
WSON-6_DSE [mm] "TI DSE0006A WSON-6 1.5x1.5, TI example board layout"
  rect 0.8x0.25 smd: 1(-0.55,0.5) 2(-0.55,0) 3(-0.55,-0.5)
  rect 0.7x0.25 smd: 4(0.6,-0.5) 5(0.6,0) 6(0.6,0.5)
  silkscreen extent -1.1,-0.9 0.75,0.9, body extent -0.75,-0.74 0.75,0.74, height 0.77
WSON-8_DSG [mm] "TI DSG0008A WSON-8 2x2, TI example board layout"
  rect 0.5x0.25 smd: 1(-0.95,0.75) 2(-0.95,0.25) 3(-0.95,-0.25) 4(-0.95,-0.75) 5(0.95,-0.75) 6(0.95,-0.25) 7(0.95,0.25) 8(0.95,0.75)
  rect 0.9x1.6 smd: 9(0,0)
  silkscreen extent -1.35,-1.15 1,1.15, body extent -1,-0.99 1,0.99, height 0.82
XTAL_3225_4P [mm] "3.2 x 2.5 mm 4-pad crystal (Abracon ABM8), x-check KiCad Crystal_SMD_3225-4Pin"
  rect 1.4x1.2 smd: 1(-1.1,-0.85) 2(1.1,-0.85) 3(1.1,0.85) 4(-1.1,0.85)
  silkscreen extent -2,-1.6 0.2,1.6, body extent -1.6,-1.25 1.6,1.25, height 0.64

## Part data
BT1: library part BATT_18650, "18650 cell holder", MPN="Keystone 1042"
BT2: library part BATT_COIN, "Coin cell retainer", MPN="Keystone 3000"
C1 C2 C6 C10: library part CAP, "Capacitor, non-polarised", MPN="generic 1210 X7R/C0G"
C3 C4 C5 C7 C11 C12 C15 C19 C20 C21 C22 C23 C24 C25 C27 C28 C29 C30 C31 C33 C34 C35 C36 C37 C38 C39 C40 C41 C42 C43: library part CAP, "Capacitor, non-polarised", MPN="generic 0603 X7R/C0G"
C8 C9 C13 C14 C16 C17 C18 C26 C32: library part CAP, "Capacitor, non-polarised", MPN="generic 0805 X7R/C0G"
D1 D2: library part DIODE_SCHOTTKY, "Schottky diode (pad 1 = cathode)", MPN="Nexperia PMEG10030ELPX"
D3: library part TVS_UNI, "Unidirectional TVS (pad 1 = cathode)", MPN="Bourns SMBJ36A"
D4 D5 D6: library part DIODE_SCHOTTKY, "Schottky diode (pad 1 = cathode)", MPN="Nexperia PMEG4030ERX"
D7: library part LED, "LED", MPN="generic 0603 green LED"
J1 J2: library part DB9_M, "DB9 male, CiA 303-1: 2 CAN_L, 3 CAN_GND, 5 SHLD, 6 GND, 7 CAN_H, 9 V+", MPN="Wurth 618009231221"
J3: library part USB_C, "USB-C 2.0 receptacle", MPN="GCT USB4105-GF-A"
J4: library part MICROSD, "microSD push-push with card-detect switch (9/10)", MPN="Hirose DM3AT-SF-PEJM5"
J5: library part FPC10_LCD, "10-pin 0.5 mm FPC, Sharp LS027B7DH01A pin order", MPN="Wurth 687110149022"
J6: library part CONN3, "3-pin connector", MPN="JST S3B-PH-SM4-TB"
J7: library part SWD_TC2050, "Tag-Connect TC2050, Cortex 10-pin SWD", MPN="Tag-Connect TC2050-IDC-NL (footprint only)"
L1: library part IND, "Inductor", MPN="Wurth 74404064330"
L2: library part IND, "Inductor", MPN="Wurth 744383430047"
L3: library part IND, "Inductor", MPN="Wurth 74404024022"
Q1 Q5: library part PMOS, "P-channel MOSFET, SOT-23", MPN="Nexperia PMV48XP"
Q2 Q3 Q4: library part NMOS, "N-channel MOSFET, SOT-23", MPN="Nexperia PMV16XN"
R1 R2 R3 R4 R5 R6 R7 R8 R9 R10 R11 R12 R13 R14 R15 R17 R18 R19 R20 R21 R22 R23 R24 R25 R26 R27 R28 R29 R30 R31 R32 R33 R34 R35 R36 R37 R38 R39 R40 R41 R42 R43 R44 R45 R46 R47 R48: library part RES, "Resistor", MPN="generic 0603 1%"
R16: library part RES, "Resistor", MPN="generic 0805 1%"
SW1 SW2: library part SW_4P, "Tactile switch, pads 1/3 and 2/4 common", MPN="Wurth 430182050816"
U1: "STM32H563VIT6 Cortex-M33 250 MHz, 2 MB flash, 640 KB SRAM, LQFP-100", MPN="ST STM32H563VIT6"
U2 U3: library part MCP2562FD, "CAN FD transceiver with VIO, SOIC-8", MPN="Microchip MCP2562FD-E/SN"
U4: library part LM5164, "LM5164-Q1 100 V 1 A synchronous buck, DDA PowerPAD", MPN="TI LM5164QDDARQ1"
U5: "BQ25170 800 mA linear charger, Li-ion / LiFePO4, WSON-8", MPN="TI BQ25170DSGR"
U6: library part BQ2970, "BQ29706 single-cell protector, OVP 3.85 V / UVP 2.5 V, WSON-6", MPN="TI BQ29706DSER"
U7: library part PAC1941, "PAC1941-1 power monitor with charge accumulator, VQFN-16", MPN="Microchip PAC1941T-1E/4MX"
U8: "TPS63802 2 A buck-boost, VSON-10", MPN="TI TPS63802DLAR"
U9: library part TPS61099, "TPS610997 5.0 V boost, 1 uA Iq, WSON-6", MPN="TI TPS610997DRVR"
U10: library part RV3028, "RV-3028-C7 RTC module, 45 nA", MPN="Micro Crystal RV-3028-C7 32.768kHz 1ppm-TA-QC"
U11 U12: library part ESD_CAN, "ESD2CANFD24-Q1 CAN FD ESD protection, SOT-23", MPN="TI ESD2CANFD24DBZRQ1"
U13: library part ESD_2CH, "TPD2E2U06 2-channel ESD, SC-70", MPN="TI TPD2E2U06DCKR"
Y1: library part XTAL_4P, "Crystal, 4-pad package, pads 2 and 4 = case", MPN="Abracon ABM8-24.000MHZ-B2-T"

## Free pads (board coordinates)
  round 125.98 hole 125.98 unplated: MH1(157.48,157.48) MH2(3779.53,157.48) MH3(157.48,2440.94) MH4(3779.53,2440.94)

## Via types
v1: diameter 23.62, hole 11.81, Top Layer to Bottom Layer, 356 vias

## Nets (pads, with @x,y where several pads share a name; then routed paths per layer and width w, separated by ;. In a path a pad name is that pad's centre, name@x,y a point inside that pad or via, vN(x,y) a via of type N, cw(c..) or ccw(c..) an arc to the next point about the centre after c; other vN are vias at no path point)
3V3: C12.1 C14.1 C15.1 C21.1 C22.1 C23.1 C24.1 C25.1 C26.1 C27.1 C28.1 C35.1 C37.1 C40.1 J7.1 Q5.2 R7.1 R12.1 R13.1 R20.1 R22.1 R23.1 R30.1 R37.1 R38.1 R39.1 R42.1 R43.1 R44.1 R45.1 R46.1 R48.1 U1.6 U1.11 U1.21 U1.22 U1.28 U1.50 U1.73 U1.75 U1.100 U2.5 U3.5 U7.2 U8.6 U10.7 | length 8283.1
  Top Layer w7.87: U8.6@1486.22,1417.32 1515.75,1417.32 1521.77,1423.35 1521.77,1464.53 1527.79,1470.55 1641.5,1470.55 1646.73,1465.32 1646.73,1410.67 1641.5,1405.43 1637.97,1405.43 1622.54,1390 v1(1620,1390) ; v1(1938.65,1544.31) 1942.91,1544.31 1949.81,1537.4 1976.38,1537.4 U1.11@1978.35,1535.43 ; v1(1944.88,1633.86) U1.6@1978.35,1633.86 ; v1(1956.69,1330.71) 1961.07,1335.09 1961.07,1336.61 1976.38,1336.61 U1.21@1978.35,1338.58 ; U1.22@1978.35,1318.9 1980.31,1320.87 1995.62,1320.87 1995.62,1322.39 v1(2000,1326.77) ; v1(2039.37,1822.83) 2043.75,1818.45 2045.28,1818.45 2045.28,1803.15 U1.100@2047.24,1801.18 ; v1(2086.61,1157.48) U1.28@2086.61,1190.94 ; U1.50@2519.69,1190.94 2521.65,1188.98 v1(2543.31,1188.98) ; U1.73@2588.58,1692.91 v1(2622.05,1692.91) ; U1.75@2588.58,1732.28 2590.55,1734.25 2605.85,1734.25 2605.85,1735.78 v1(2610.24,1740.16) ; v1(3020,2085) 3020.35,2084.65 C12.1@3021.65,2084.65 3032.48,2095.47 3091.54,2095.47 U7.2@3092.52,2096.46
  Top Layer w15.75: R48.1@492.13,1700.79 v1(515.75,1700.79) ; C35.1@785.43,600.39 786.42,599.41 810.04,599.41 v1(811.02,598.43) ; R38.1@785.43,895.67 786.42,896.65 810.04,896.65 v1(811.02,897.64) ; U2.5@815.16,673.23 v1(838.58,673.23) ; R42.1@1082.68,1877.95 1082.73,1877.9 1106.22,1877.9 v1(1106.27,1877.86) ; U10.7@1206.69,1907.48 1207.68,1906.5 1227.36,1906.5 v1(1228.35,1905.51) ; C40.1@1279.53,1877.95 1280.51,1877.95 1296.72,1861.74 1301.64,1861.74 v1(1303.15,1860.24) ; R23.1@1316.93,1328.74 1317.91,1329.72 1337.6,1329.72 v1(1338.58,1330.71) ; C14.1@1348.43,1409.45 v1(1370.08,1409.45) ; J7.1@1671.65,2140.35 v1@1688.78,2157.48 ; C27.1@1801.18,1307.09 v1(1826.77,1307.09) ; C15.1@1838.58,1446.85 1839.57,1447.83 1861.22,1447.83 v1(1862.2,1448.82) ; C26.1@1889.76,1281.5 1890.75,1280.51 1912.4,1280.51 v1(1913.39,1279.53) ; C28.1@1899.61,1661.42 v1(1921.26,1661.42) ; C21.1@2035.43,1112.2 2036.42,1111.22 2058.07,1111.22 v1(2059.06,1110.24) ; C24.1@2035.43,1879.92 2044.68,1870.68 2044.68,1861.74 v1(2046.18,1860.24) ; R43.1@2096.46,1956.69 v1(2118.11,1956.69) ; R44.1@2173.23,2017.72 2174.21,2016.73 2195.87,2016.73 v1(2196.85,2015.75) ; C37.1@2281.5,600.39 2282.48,599.41 2306.1,599.41 v1(2307.09,598.43) ; R39.1@2281.5,895.67 2282.48,896.65 2306.1,896.65 v1(2307.09,897.64) ; U3.5@2311.22,673.23 v1(2334.65,673.23) ; R13.1@2429.13,1033.46 2430.12,1032.48 2451.77,1032.48 v1(2452.76,1031.5) ; C22.1@2429.13,1112.2 2430.12,1111.22 2451.77,1111.22 v1(2452.76,1110.24) ; C23.1@2667.32,1700.79 v1(2688.98,1700.79) ; C25.1@2677.17,1562.99 v1(2687.7,1562.99) ; R12.1@2852.36,1131.89 2853.35,1132.87 2873.03,1132.87 v1(2874.02,1133.86) ; R30.1@2962.6,1690.94 2963.58,1691.93 2983.27,1691.93 v1(2984.25,1692.91) ; R37.1@3000,1289.37 3000.98,1290.35 3022.64,1290.35 v1(3023.62,1291.34) ; R45.1@3019.69,2529.53 3020.67,2528.54 3042.32,2528.54 v1(3043.31,2527.56) ; Q5.2@3108.27,1690.94 3110.24,1692.91 v1(3129.92,1692.91) ; R22.1@3275.59,2037.4 3276.57,2038.39 3298.23,2038.39 v1(3299.21,2039.37) ; R20.1@3277.56,2114.17 v1(3299.21,2114.17) ; R7.1@3356.3,687.01 3357.28,686.02 3376.97,686.02 v1(3377.95,685.04) ; R46.1@3452.76,2529.53 3453.74,2528.54 3475.39,2528.54 v1(3476.38,2527.56)
  Top Layer w19.68: v1(784,375) 784.72,375.72 784.72,598.28 784,599 C35.1@785.43,600.39 785.43,662.21 796.26,673.03 U2.5@814.96,673.03 ; v1(811.02,598.43) 811.02,644.6 838.58,672.16 v1(838.58,673.23) ; v1(1095,1661.41) 1270.67,1837.08 1270.67,1870.08 1278.54,1877.95 C40.1@1279.53,1877.95 ; C14.1@1348.43,1409.45 1353.25,1414.27 1353.25,1444.25 v1(1354,1445) v1@1352,1447 ; v1(1832,1276.41) 1833.07,1276.41 1838.15,1281.5 C26.1@1889.76,1281.5 ; v1(1921.26,1661.42) 1921.26,1660.35 1933.15,1648.46 1933.15,1646.66 1944.88,1634.92 v1(1944.88,1633.86) ; C21.1@2036.42,1111.22 2043.31,1104.33 2043.31,1089.76 2065,1068.07 v1(2065,1067) ; v1(2207,740.03) 2207.75,739.28 2226.08,739.28 2290.35,675 2309.06,675 U3.5@2311.02,673.03 ; C23.1@2667.32,1700.79 2687.73,1695.75 2711,1690 v1(2713,1688) ; v1(2921,1679) 2922.07,1679 2926.14,1683.07 2954.72,1683.07 R30.1@2962.6,1690.94 ; R37.1@3000,1289.37 3007.87,1281.5 3007.87,1259.13 v1(3046,1221)
  Mid-Layer 1 w19.68: v1(1095,1661.41) 1182.29,1661.41 1316.65,1527.04 1316.65,1482.35 v1(1354,1445) 1419.07,1445 1474.07,1390 v1(1620,1390) ; v1(1228.35,1905.51) 1274.52,1905.51 1286.06,1893.98 1286.06,1878.4 1303.15,1861.3 v1(1303.15,1860.24) ; v1(1688.98,2157.48) 1830.71,2015.75 v1(2196.85,2015.75) ; v1(1826.77,1307.09) 1884.76,1307.09 1912.32,1279.53 v1(1913.39,1279.53) ; v1(1956.69,1330.71) 1957.45,1329.95 1995.75,1329.95 1998.93,1326.77 v1(2000,1326.77) ; v1(2065,1067) 2409.52,1067 v1(2452.76,1110.24) 2453,1110.24 2453.51,1110.75 2453.51,1148.68 2493.8,1188.98 v1(2543.31,1188.98) ; v1(2687.7,1562.99) 2700.79,1562.99 ; v1(2921,1679) 2804.99,1562.99 2700.79,1562.99 ; v1(2984.25,1692.91) 2985.01,1693.67 2990.62,1693.67 2992.9,1695.95 3125.83,1695.95 3128.86,1692.91 v1(3129.92,1692.91) ; v1(3020,2085) 3020.11,2085 3052.67,2117.56 3155.56,2117.56 3158.94,2114.17 v1(3299.21,2114.17) ; v1(3043.31,2527.56) 3245,2527.56 3259.84,2512.72 3460.47,2512.72 3475.31,2527.56 v1(3476.38,2527.56) ; v1(3046,1221) 2996.97,1270.03 2996.97,1501.36 2975.61,1522.72 2890.41,1522.72 2881.04,1513.35 2750.43,1513.35 2700.79,1562.99
  Mid-Layer 2 w19.68: v1(784,375) 784,869.55 811.02,896.57 v1(811.02,897.64) ; v1(1338.58,1330.71) 1338.58,1377.95 v1(1370.08,1409.45) ; v1(1832,1276.41) 1862.2,1306.61 v1(1862.2,1448.82) ; v1(2039.37,1822.83) 2039.37,1823.9 2045.43,1829.96 2045.43,1859.48 v1(2046.18,1860.24) ; v1(2059.06,1110.24) 2059.06,1111.3 2085.86,1138.11 2085.86,1156.73 v1(2086.61,1157.48) ; v1(2207,740.03) 2207,797.55 v1(2307.09,897.64) ; v1(2307.09,598.43) 2307.09,644.6 2334.65,672.16 v1(2334.65,673.23) ; v1(2452.76,1031.5) v1(2452.76,1110.24) ; v1(2610.24,1740.16) 2610.99,1739.4 2610.99,1705.04 2622.05,1693.98 v1(2622.05,1692.91) ; v1(2687.7,1562.99) 2688.77,1562.99 2707.49,1581.72 2713.52,1581.72 2727.44,1595.64 2727.44,1672.49 2713,1686.93 v1(2713,1688) ; v1(2874.02,1133.86) 2916.55,1133.86 3023.62,1240.93 v1(3023.62,1291.34) ; v1(3299.21,2039.37) v1(3299.21,2114.17)
5V_AUX: C17.1 C18.1 C34.1 C36.1 C38.1 C39.1 J5.6 J5.7 J5.8 U2.3 U3.3 U9.2 | length 3608.7
  Top Layer w7.87: C38.1@1417.32,2224.41 C38.1@1425.2,2224.41
  Top Layer w19.68: C18.1@511.81,700.79 568.9,700.79 581.69,713.58 581.69,721.06 583.66,723.03 U2.3@602.36,723.03 604.33,725 623.03,725 753.27,855.24 1111.14,855.24 C39.1@1346.46,1090.55 ; C36.1@1287.4,2224.41 1287.4,2223.43 1321.95,2188.88 1322.93,2188.88 1322.93,2163.58 1333.74,2152.77 1333.74,1800.83 1201.61,1668.71 1201.61,1316.77 1330.71,1187.67 1330.71,1173.23 1340.55,1163.39 C17.1@1348.43,1163.39 ; 1323.02,2188.98 1390.75,2188.98 1425.2,2223.43 C38.1@1425.2,2224.41 ; 1355,2395 1381.78,2395 1386.73,2390.04 1386.73,2263.86 1417.32,2233.27 C38.1@1417.32,2224.41 ; U9.2@1418.31,1181.1 1408.14,1181.1 1400.27,1173.23 1358.27,1173.23 C17.1@1348.43,1163.39 ; U3.3@2098.43,723.03 2035.04,723.03 2018.7,706.69 C34.1@2017.72,706.69 1731.3,706.69 1356.3,1081.69 C39.1@1356.3,1082.68 1348.43,1090.55 1350.31,1090.55 1351.3,1091.54 1351.3,1160.51 C17.1@1348.43,1163.39
5V_BUCK: C4.2 C6.1 D4.2 L1.2 R4.1 | length 956.9
  Top Layer w19.68: D4.2@2832.68,1437.01 2884.84,1437.01 2899.61,1422.25 2899.61,1392.72 2913.39,1378.94 2972.44,1378.94 2986.22,1365.16 2986.22,1335.63 2987.54,1334.31 ; R4.1@3031.5,1090.55 3030.51,1090.55 2971.65,1149.41 2971.65,1229.71 2967.44,1233.92 2967.44,1314.22 2987.54,1334.31 ; L1.2@3299.21,1122.05 3299.21,1198.82 3273.62,1224.41 3264.76,1224.41 3200.79,1288.39 3200.79,1290.35 3165.08,1326.07 2995.78,1326.07 2987.54,1334.31
BB_FB: R23.2 R24.1 U8.4 | length 402
  Top Layer w5.91: R24.1@1259.84,1425.2 1260.83,1425.2 1275.59,1410.43 1275.59,1405.59 1312.24,1368.94 1340.71,1368.94 1379.92,1329.72 1379.92,1327.76 1394.69,1312.99 1412.21,1312.99 1417.39,1307.82 v1(1422.18,1307.82) ; U8.4@1421.26,1437.01 1428.15,1437.01 1434.96,1430.2 1436.37,1430.2 1441.02,1425.54 1441.02,1400.82 1435,1394.79 v1(1435,1390)
  Bottom Layer w5.91: v1(1422.18,1307.82) 1391.37,1338.63 1391.37,1365.97 1414.33,1388.93 1433.93,1388.93 v1(1435,1390)
BB_L1: L2.1 U8.9 | length 365.9
  Top Layer w11.81: L2.1@1428.15,1653.54 1428.15,1674.21 1455.79,1701.85 1506.49,1701.85 1520.59,1687.75 1520.59,1525.99 1528.57,1518.01 1528.57,1492.32 1513.62,1477.36 U8.9@1498.03,1477.36
BB_L2: L2.2 U8.7 | length 673.6
  Top Layer w7.87: L2.2@1485.24,1653.54 1485.24,1632.87 1416.22,1563.86 1408.53,1563.86 1375.11,1530.43 1334.72,1530.43 1311.93,1507.64 1311.93,1386.06 1317.17,1380.83 1385.11,1380.83 1420.93,1345 1455,1345 1486.22,1376.22 1486.22,1398.85 1481.61,1403.46 1464.8,1403.46 1459.57,1408.7 1459.57,1425.95 1464.8,1431.18 1467.83,1431.18 1472.44,1435.79 1472.44,1436.02 1473.42,1437.01 U8.7@1486.22,1437.01
BOOST_SW: L3.2 U9.5 | length 154.3
  Top Layer w19.68: U9.5@1495.08,1181.1 1536.91,1181.1 1564.96,1209.15 1624.51,1209.15 L3.2@1633.86,1218.5
BOOT0: R25.1 U1.94 | length 174.9
  Top Layer w5.91: U1.94@2165.35,1801.18 2165.35,1848.82 2168.81,1852.28 2197.19,1852.28 2201.85,1856.94 2201.85,1885.32 2206.53,1890 2241.89,1890 R25.1@2253.94,1877.95
BTN1: C41.1 R45.2 SW1.1 SW1.3 U1.42 | length 2159.5
  Top Layer w5.91: v1(2216.54,1614.33) 2219.93,1617.72 2231.26,1617.72 2234.25,1620.71 2240.16,1620.71 2279.53,1581.34 v1(2279.53,1240.16) ; v1(2362.2,1157.48) U1.42@2362.2,1190.94 ; v1(2510,2030) 2847.44,2367.44 2847.44,2428.15 2870.08,2450.79 SW1.1@2875,2450.79 2875,2532.48 C41.1@2881.89,2539.37 ; 2874.02,2500 3054.13,2500 R45.2@3082.68,2528.54 ; SW1.3@3187.99,2450.79 3183.07,2450.79 3120.08,2513.78 3097.44,2513.78 R45.2@3082.68,2528.54 ; R45.2@3082.68,2528.54 R45.2@3082.68,2529.53 R45.2@3082.68,2528.54
  Mid-Layer 2 w5.91: v1(2279.53,1240.16) v1(2362.2,1157.48)
  Bottom Layer w5.91: v1(2216.54,1614.33) 2216.54,1774.91 2471.63,2030 v1(2510,2030)
BTN2: C42.1 R46.2 SW2.1 SW2.3 U1.43 | length 2126.8
  Top Layer w5.91: v1(2360,1255) 2381.89,1233.11 U1.43@2381.89,1190.94 ; 3307.09,2500 3487.2,2500 R46.2@3515.75,2528.54 ; v1(3308.07,2450.79) 3308.07,2532.48 C42.1@3314.96,2539.37 ; R46.2@3515.75,2529.53 R46.2@3515.75,2528.54 ; SW2.3@3621.06,2450.79 3616.14,2450.79 3553.15,2513.78 3530.51,2513.78 R46.2@3515.75,2528.54
  Mid-Layer 2 w5.91: v1(2360,1255) 2471.93,1366.93 2481.93,1366.93 2590.47,1475.47 2590.47,1748.34 2940,2097.87 2955.15,2097.87 v1(3308.07,2450.79)
BUCK_BST: C3.1 U4.7 | length 154
  Top Layer w5.91: C3.1@3226.38,935.04 3226.38,881.1 3230.59,876.89 3230.59,838.7 3256.89,812.4 U4.7@3275.59,812.4
BUCK_EN: R1.2 R2.1 U4.3 | length 727.1
  Top Layer w5.91: R1.2@2748.03,551.18 2748.03,618.03 2845,715 2910,715 v1(2930,695) ; R2.1@2805.12,874.02 v1(2826.77,874.02) ; v1(3003.94,783.46) 3025,762.4 U4.3@3062.99,762.4
  Bottom Layer w5.91: v1(2826.77,874.02) 2913.39,874.02 2998.15,789.25 2998.15,785.55 2996.06,783.46 2998.15,783.46 v1(3003.94,783.46) ; v1(2930,695) 3000.55,765.55 3000.55,778.98 v1@2996.18,783.34
BUCK_FB: C5.2 R4.2 R5.1 U4.5 | length 1037
  Top Layer w5.91: R4.2@3031.5,1153.54 3032.48,1153.54 3074.72,1111.3 3074.72,1006.55 3108.83,972.44 v1(3212.6,972.44) ; U4.5@3275.59,712.4 3294.29,712.4 3326.69,744.8 3326.69,806.02 3360.24,839.57 3361.22,839.57 R5.1@3366.14,844.49 3367.13,844.49 3458.74,936.1 3525.1,936.1 3550.28,961.27 3550.28,1019.61 3524.61,1045.28 C5.2@3523.62,1045.28 ; v1(3303.15,897.64) 3306.54,894.25 3315.4,894.25 3362.2,847.44 R5.1@3362.2,838.58
  Bottom Layer w5.91: v1(3212.6,972.44) 3284.01,901.03 3299.76,901.03 v1(3303.15,897.64)
BUCK_RIP: C4.1 C5.1 R6.2 | length 560.5
  Top Layer w5.91: C4.1@3137.8,1289.37 3137.8,1262.2 v1(3215,1185) ; v1(3385,1100) 3446.85,1038.15 R6.2@3446.85,984.25 3521.65,984.25 C5.1@3523.62,982.28
  Bottom Layer w5.91: v1(3215,1185) v1(3215,1185) 3299.96,1185.04 v1(3385,1100)
BUCK_RON: R3.1 U4.4 | length 258.9
  Top Layer w5.91: U4.4@3062.99,712.4 3081.69,712.4 3106.38,737.09 3106.38,916.26 3088.58,934.06 R3.1@3088.58,935.04
BUCK_SW: C3.2 L1.1 R6.1 U4.8 | length 488.1
  Top Layer w19.68: L1.1@3118.11,1122.05 3118.11,1045.28 3143.7,1019.69 3205.71,1019.69 C3.2@3289.37,936.02 ; U4.8@3275.59,862.4 3275.59,920.28 3289.37,934.06 C3.2@3289.37,935.04 ; R6.1@3383.86,984.25 3337.6,984.25 C3.2@3289.37,936.02 ; C3.2@3289.37,935.04 C3.2@3289.37,936.02 ; C3.2@3289.37,935.04 C3.2@3289.37,936.02
CAN1_H_C: J1.7 U2.7 U11.1 | length 864
  Top Layer w7.87: U2.7@814.96,773.03 894.29,773.03 U11.1@1045.28,622.05 ; J1.7@890.35,314.96 1013.5,438.11 1013.5,451.65 1140.83,578.98 1140.83,655.39 1136.21,660 1101.77,660 1098.19,656.42 1079.64,656.42 U11.1@1045.28,622.05 ; U11.1@1045.28,608.27 U11.1@1045.28,622.05
CAN1_L_C: J1.2 U2.6 U11.2 | length 593.3
  Top Layer w7.87: U2.6@814.96,723.03 833.66,723.03 908.96,647.74 908.96,638.29 976.38,570.87 976.38,566.93 ; J1.2@835.83,426.77 976.18,567.13 1054.17,567.13 1095.32,608.27 U11.2@1120.08,608.27
CAN1_RX: U1.81 U2.4 | length 2545.5
  Top Layer w5.91: U2.4@602.36,673.03 661.39,673.03 781.15,792.8 1497.52,792.8 v1(1551.18,846.46) ; v1(2417.32,1897.64) 2417.32,1839.86 2421.26,1835.93 U1.81@2421.26,1801.18
  Mid-Layer 2 w5.91: v1(2245,1545) 2245.79,1545 2437.09,1736.3 2437.09,1806.46 2417.32,1826.23 v1(2417.32,1897.64)
  Bottom Layer w5.91: v1(1551.18,846.46) 1551.18,848.82 2245,1542.64 v1(2245,1545)
CAN1_STBY: R38.2 U1.84 U2.8 | length 2269.6
  Top Layer w5.91: U2.8@815.16,823.03 v1(818.9,826.77) ; v1(838.58,881.89) 838.58,885.83 R38.2@848.43,895.67 848.43,896.65 1121.06,1169.29 v1(1303.15,1169.29) ; v1(2303.15,1889.76) 2343.19,1889.76 2376.29,1856.66 2376.29,1844.82 2368.03,1836.56 2368.03,1824.73 2362.2,1818.9 U1.84@2362.2,1801.18
  Mid-Layer 2 w5.91: v1(2279.53,1759.84) 2279.53,1866.14 v1(2303.15,1889.76)
  Bottom Layer w5.91: v1(818.9,826.77) 818.9,862.21 v1(838.58,881.89) ; v1(1303.15,1169.29) 1424.81,1169.29 1436.54,1181.02 1665.67,1181.02 1874.49,1389.84 2004.25,1389.84 2008.27,1385.83 2051.57,1385.83 2299.76,1634.02 2299.76,1739.61 v1(2279.53,1759.84)
CAN1_TX: U1.82 U2.1 | length 2649.6
  Top Layer w5.91: U2.1@602.36,823.03 621.06,823.03 1174.76,1376.73 1174.76,1468.19 v1(1101,1541.95) ; v1(1920,1795) 1949.01,1824.01 1949.01,1892.38 2031.48,1974.85 v1(2060.95,1974.85) ; v1(2220.47,1980.32) 2268.06,1980.32 2401.57,1846.8 U1.82@2401.57,1801.18
  Mid-Layer 2 w5.91: v1(2060.95,1974.85) 2089.03,1974.85 2094.49,1980.32 v1(2220.47,1980.32)
  Bottom Layer w5.91: v1(1101,1541.95) 1100.61,1542.34 1100.61,1568.33 1342.9,1810.61 1904.39,1810.61 v1(1920,1795)
CAN2_H_C: J2.7 U3.7 U12.1 | length 734.1
  Top Layer w7.87: U3.7@2311.02,773.03 2329.72,773.03 2366.99,735.77 2366.99,728.01 v1(2370,725) ; J2.7@2386.42,314.96 2291.46,409.92 2291.46,443.52 2437.01,589.07 2437.01,594.49 ; v1(2417.32,614.17) 2437.01,594.49 ; U12.1@2541.34,608.27 2450.79,608.27 2437.01,594.49
  Bottom Layer w7.87: v1(2370,725) 2370,695.96 2366.14,692.1 2366.14,667.32 2417.32,616.14 v1(2417.32,614.17)
CAN2_L_C: J2.2 U3.6 U12.2 | length 833.9
  Top Layer w7.87: v1(2245,775) 2248.01,771.99 2248.01,767.34 2292.32,723.03 U3.6@2311.02,723.03 ; J2.2@2331.89,426.77 2478.86,573.74 2556.85,573.74 2591.38,608.27 U12.2@2616.14,608.27
  Bottom Layer w7.87: v1(2245,775) 2245,689.85 2331.89,602.96 J2.2@2331.89,426.77
CAN2_RX: U1.51 U3.4 | length 1101.6
  Top Layer w5.91: v1(2051.1,673.03) U3.4@2098.43,673.03 ; U1.51@2588.58,1259.84 2629.84,1259.84 v1(2650,1280)
  Mid-Layer 2 w5.91: v1(2051.1,673.03) 2259.25,673.03 2329.79,743.57 2350.62,743.57 2440.82,833.77 2440.82,913.65 2503.63,976.46 2516.22,976.46 2630,1090.24 2630,1255 v1@2645,1270
CAN2_STBY: R39.2 U1.53 U3.8 | length 624.4
  Top Layer w5.91: U3.8@2311.02,823.03 2311.02,861.22 2344.49,894.69 2344.49,896.65 2412.95,965.11 2417.87,965.11 v1(2421.26,968.5) ; v1(2578.74,1161.42) 2578.66,1161.5 2578.66,1216.68 2557.01,1238.34 2557.01,1288.73 2561.67,1293.39 2565.04,1293.39 2570.87,1299.21 U1.53@2588.58,1299.21
  Bottom Layer w5.91: v1(2421.26,968.5) 2578.74,1125.98 v1(2578.74,1161.42)
CAN2_TX: U1.52 U3.1 | length 981.3
  Top Layer w5.91: U3.1@2098.43,823.03 2117.13,823.03 2125.99,831.89 2125.99,846.85 2247.64,968.5 v1(2342.52,968.5) ; U1.52@2588.58,1279.53 2606.3,1279.53 2612.12,1285.35 2615.5,1285.35 2645.14,1315 2713.19,1315 2716.65,1311.54 2716.65,1306.65 2712.32,1302.32 2704,1302.32 2684.88,1283.2 2684.88,1274.88 2619.33,1209.33 v1(2598.43,1209.33)
  Bottom Layer w5.91: v1(2342.52,968.5) 2504.02,1130 2515.83,1130 2595.16,1209.33 v1(2598.43,1209.33)
CELL_N: BT1.2 C11.2 Q2.2 U6.4 | length 1073.2
  Top Layer w19.68: v1(235,1575) 330.48,1479.52 330.48,1468.74 444.21,1355 619.41,1355 ; 619.41,1389.41 619.41,1355 ; C11.2@1015.75,1466.54 1007.87,1458.66 1007.87,1439.64 830.05,1261.81 Q2.2@726.38,1261.81 724.41,1263.78 710.63,1263.78 662.4,1312.01 619.41,1355
  Bottom Layer w19.68: BT1.2@209.06,1574.8 209.25,1575 v1(235,1575)
CELL_P: BT1.1 R16.1 R17.1 U7.11 | length 1385.9
  Top Layer w11.81: U7.11@3206.69,2096.46 3212.87,2096.46 3215.75,2093.58 3226.96,2093.58 3245.54,2075 3352.82,2075 3367.2,2060.62 3367.2,1951.52 3260.75,1845.07 3260.75,1662.32 3228.35,1629.92 ; 3240.16,1618.11 3241.65,1619.6 3253.65,1619.6 v1(3255.91,1621.86)
  Top Layer w19.68: R17.1@2755.91,1641.73 2756.89,1641.73 2804.13,1594.49 R16.1@2994.09,1594.49 2994.09,1602.36 3029.53,1637.8 3096.12,1637.8 3141.73,1637.8 3157.48,1622.05 3255.72,1622.05 v1(3255.91,1621.86)
  Bottom Layer w11.81: v1(3255.91,1621.86) 3283.46,1594.3 BT1.1@3283.46,1574.8
  Bottom Layer w19.68: v1(3255.91,1621.86) 3287.2,1621.86 BT1.1@3334.25,1574.8
CHG_DIS: Q4.1 R14.1 U1.40 | length 1110.7
  Top Layer w5.91: v1(2322.83,1157.48) U1.40@2322.83,1190.94 ; v1(3047.24,1437.01) Q4.1@3049.21,1435.04 ; v1(3047.24,1492.13) 3047.24,1503.94 R14.1@3049.21,1505.91
  Bottom Layer w5.91: v1(2322.83,1157.48) 2429.13,1263.78 2527.17,1263.78 2543.7,1263.78 2551.81,1255.67 2703.9,1255.67 2779.33,1180.24 2953.19,1180.24 3047.17,1274.22 3047.17,1436.93 v1(3047.24,1437.01) v1(3047.24,1492.13)
CHG_ISET: R10.1 U5.2 | length 176.6
  Top Layer w5.91: R10.1@2490.16,893.7 2498.03,885.83 v1(2515.75,885.83) ; v1(2590.55,885.83) 2595.35,885.83 2605.11,895.59 2659.37,895.59 U5.2@2659.45,895.67
  Bottom Layer w5.91: v1(2515.75,885.83) v1(2590.55,885.83)
CHG_PG: R13.2 U1.39 U5.6 | length 767.4
  Top Layer w5.91: U1.39@2303.15,1190.94 2303.15,1173.23 2297.32,1167.4 2297.32,1166.82 2297.32,1164.03 2292.66,1159.37 2271.58,1159.37 2265,1152.79 2265,1090.88 2330.37,1025.51 2374.36,1025.51 2391.24,1042.4 2391.24,1043.23 2408.12,1060.12 2466.46,1060.12 2492.13,1034.45 R13.2@2492.13,1033.46 2501.97,1023.62 v1(2535.43,1023.62) ; U5.6@2734.25,875.98 2735.24,876.97 2758.86,876.97 v1(2759.84,877.95)
  Bottom Layer w5.91: v1(2535.43,1023.62) 2535.82,1023.62 2681.41,878.03 v1(2759.84,877.95) v1(2759.84,877.95)
CHG_STAT: R12.2 U1.38 U5.5 | length 1126.5
  Top Layer w5.91: U1.38@2283.46,1190.94 2283.46,1208.66 2289.29,1214.49 2289.29,1217.86 2371.43,1300 2405,1300 v1(2465,1240) ; U5.5@2734.25,856.3 2739.17,856.3 2757.08,838.39 2771.61,838.39 v1(2775,835) ; v1(2811.02,1110.24) 2815.82,1110.24 2820.82,1105.24 2889.68,1105.24 2915.35,1130.91 R12.2@2915.35,1131.89
  Mid-Layer 2 w5.91: v1(2775,835) 2775,865.16 2787.48,877.64 2787.48,942.83 2787.32,942.99 2787.32,1086.53 v1(2811.02,1110.24)
  Bottom Layer w5.91: v1(2465,1240) 2571.61,1240 2576.37,1244.76 2678.19,1244.76 2692.17,1230.78 2692.17,1229.09 v1(2811.02,1110.24)
CHG_VSET: R11.1 U5.7 | length 211
  Top Layer w5.91: U5.7@2734.25,895.67 2736.22,897.64 2744.09,897.64 v1(2767.72,921.26) ; v1(2807.09,1000) 2810.48,1003.39 2810.48,1010.28 2852.36,1052.17 R11.1@2852.36,1053.15
  Bottom Layer w5.91: v1(2767.72,921.26) 2767.72,960.63 v1(2807.09,1000)
EXTCOMIN: J5.4 U1.37 | length 1922.8
  Top Layer w5.91: J5.4@1309.06,2421.26 1309.06,2455.71 1336.77,2483.43 1615.39,2483.43 1847,2251.81 1847,2239.61 v1(1850.39,2236.22) ; v1(2177.17,1614.33) 2177.17,1314.57 2263.78,1227.96 U1.37@2263.78,1190.94
  Bottom Layer w5.91: v1(1850.39,2236.22) 2006.51,2080.1 2022.65,2080.1 2160,1942.75 2160,1670.71 2165.07,1665.64 2165.07,1661.22 2177.17,1649.12 v1(2177.17,1614.33)
FET_MID: Q2.3 Q3.3 | length 177.2
  Top Layer w19.68: Q2.3@809.06,1299.21 Q3.3@809.06,1476.38